# EAGLE board VCAMatrix (EAGLE 7.5.0), part 1 of 2
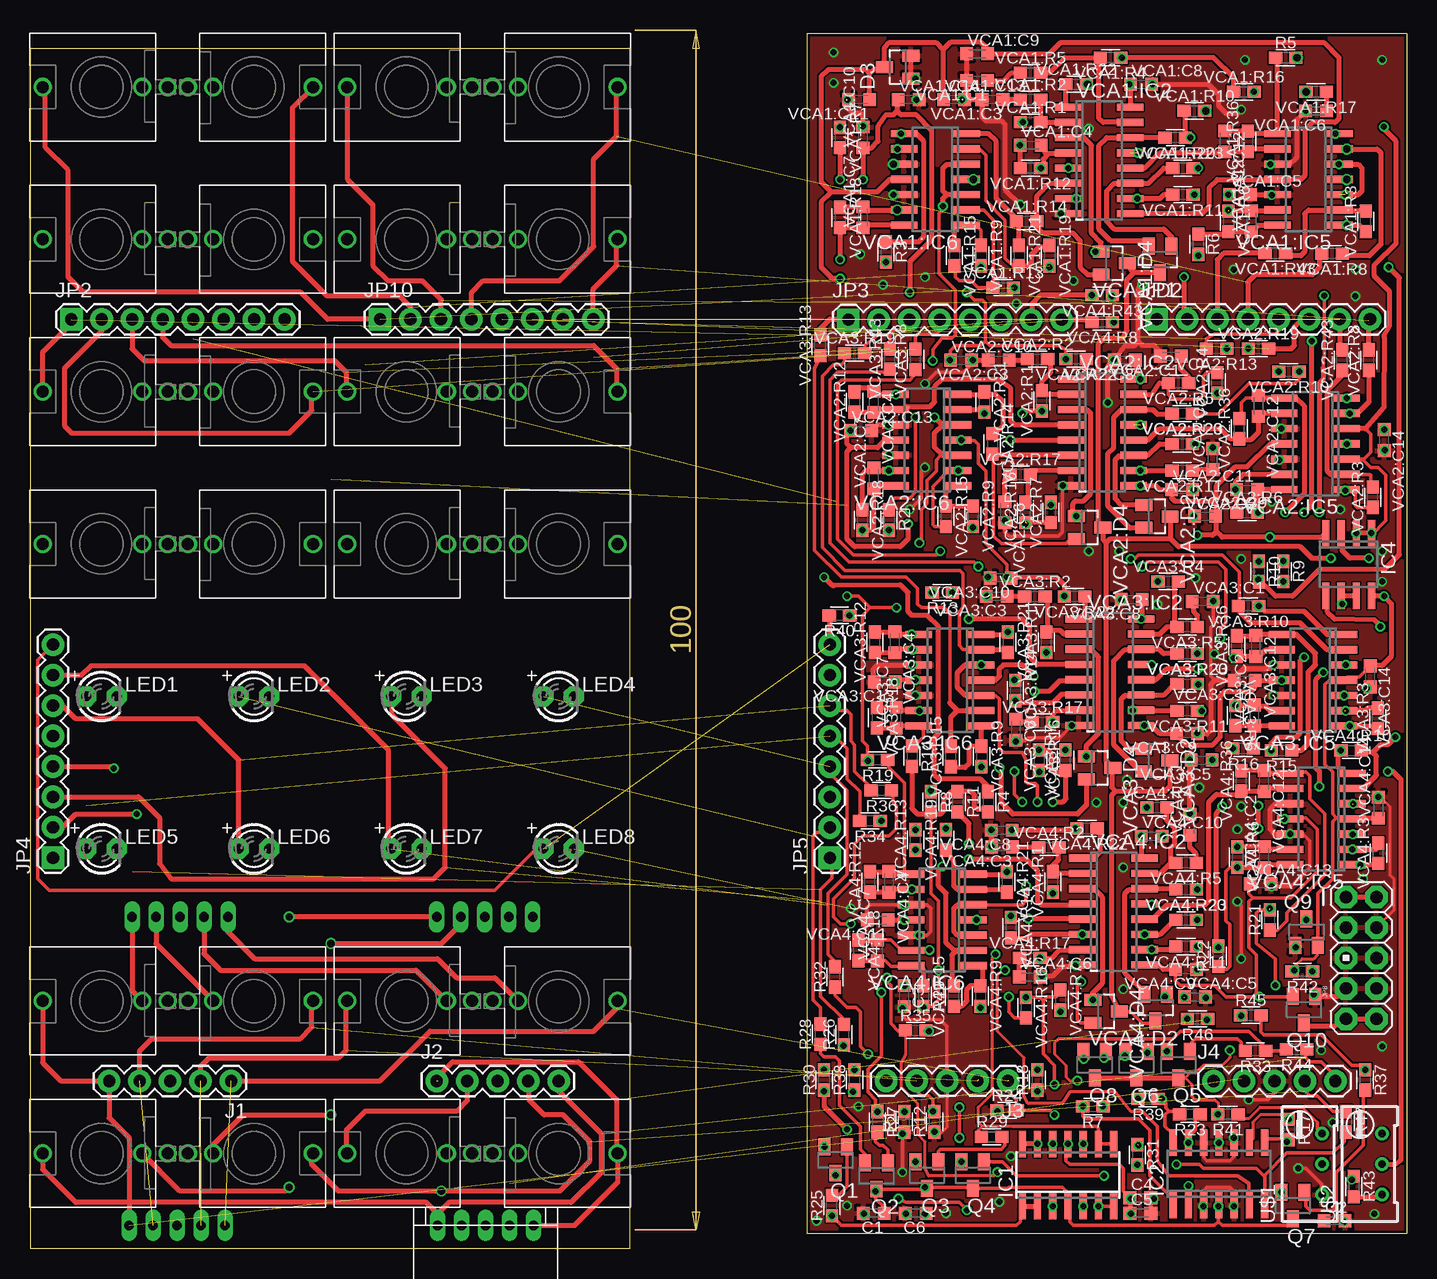
[diagram p0: board, top side]
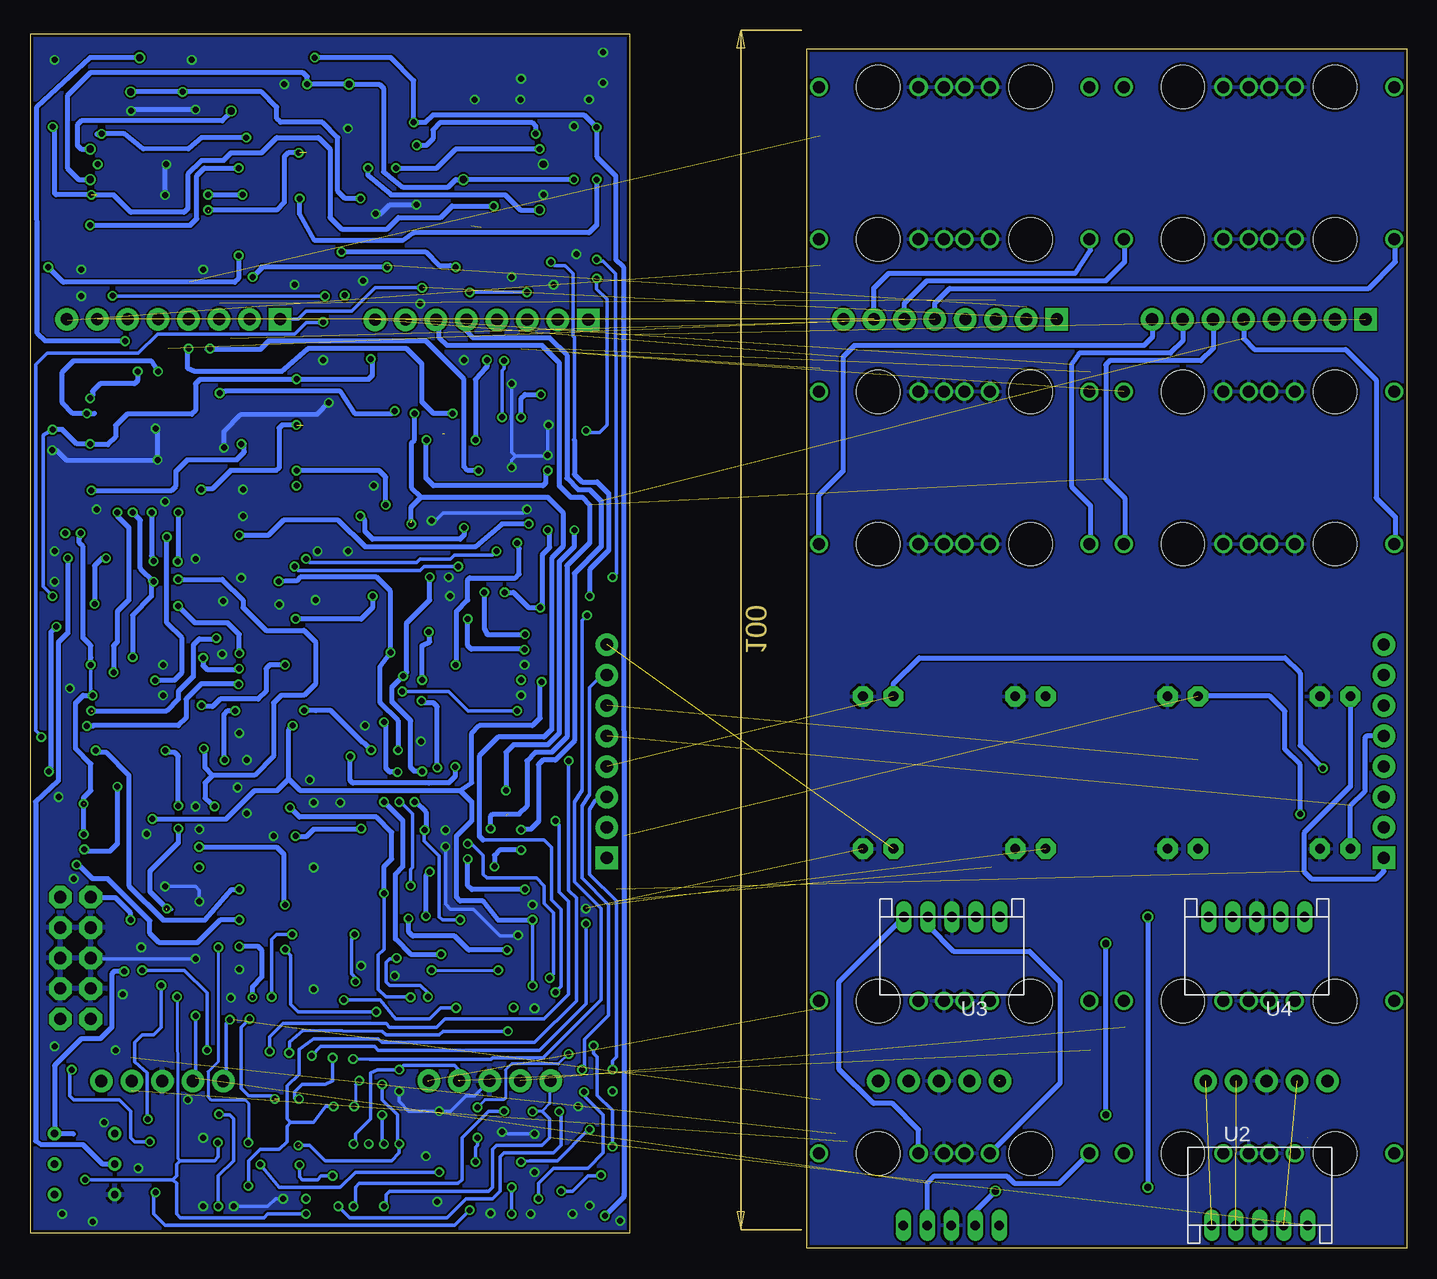
[diagram p1: board, bottom side, seen from below]

Size 114.77 x 101.24 mm. Coordinates in mm from the lower left corner, seen from the top.
Outline: 0,0 50,0 50,100 0,100 0,0
Outline: 114.77,101.24 64.77,101.24 64.77,1.24 114.77,1.24 114.77,101.24
Copper layers (1*16): Top 0.035mm / dielectric 1.5mm / Bottom 0.035mm
Design rules "SeeedStudio_2layer_DRU_no_angle_20140221": minimum track width 6mil, minimum drill 12mil, track to track 6mil, track to pad 6mil, pad to pad 6mil, via to via 6mil, smd to smd 0mil, copper to edge 10mil, drill to drill 10mil, minimum pad ring 10mil, minimum via ring 6mil, stop-mask expansion 2mil, vias tented up to drill 100mil, thermal gap 10mil

## Footprints (pad centres in the part's own frame; a part is rotated, then mirrored left to right if it is on the bottom)
C0603K = smd 1.05 x 1.08: 1 -0.875,0; 2 0.875,0
THONKICONN = drill 1: P$1 0,-5.5; P$2 0,-3.38; P$3 0,4.92 | hole 3.6: 0,0
SOT23 = smd 1 x 1.4: 1 -0.95,-1.1; 2 0.95,-1.1; 3 0,1.1
SO14 = smd 0.6 x 2.2: 1 -3.81,-2.6; 2 -2.54,-2.6; 3 -1.27,-2.6; 4 0,-2.6; 5 1.27,-2.6; 6 2.54,-2.6; 7 3.81,-2.6; 8 3.81,2.6; 9 2.54,2.6; 10 1.27,2.6; 11 0,2.6; 12 -1.27,2.6; 13 -2.54,2.6; 14 -3.81,2.6
SO08 = smd 0.6 x 2.2: 1 -1.905,-2.6; 2 -0.635,-2.6; 3 0.635,-2.6; 4 1.905,-2.6; 5 1.905,2.6; 6 0.635,2.6; 7 -0.635,2.6; 8 -1.905,2.6
1X05 = drill 1.016 pad 1.88: 1 0,0; 2 2.54,0; 3 5.08,0; 4 7.62,0; 5 10.16,0
1X08 = drill 1.016 pad 1.88 square: 1 0,0 | drill 1.016 pad 1.88: 2 2.54,0; 3 5.08,0; 4 7.62,0; 5 10.16,0; 6 12.7,0; 7 15.24,0; 8 17.78,0
AVR_ICSP = drill 1.016 pad 1.88 octagon: 1 -1.27,5.08; 2 1.27,5.08; 3 -1.27,2.54; 4 1.27,2.54; 5 -1.27,0; 6 1.27,0; 7 -1.27,-2.54; 8 1.27,-2.54; 9 -1.27,-5.08; 10 1.27,-5.08
LED3MM = drill 0.813 pad 1.676 octagon: A -1.27,0; K 1.27,0
0603 = smd 1.1 x 1: 1 -0.85,0; 2 0.85,0
CON-JST_PH_5W = drill 0.8 long: P1 0,0; P2 -2,0; P3 -4,0; P4 -6,0; P5 -8,0
RTRIM64W = drill 0.61: 1 1.27,-2.54; 2 1.27,0; 3 1.27,2.54
SOIC16N = smd 0.6 x 2.2: 1 -4.445,-2.6; 2 -3.175,-2.6; 3 -1.905,-2.6; 4 -0.635,-2.6; 5 0.635,-2.6; 6 1.905,-2.6; 7 3.175,-2.6; 8 4.445,-2.6; 9 4.445,2.6; 10 3.175,2.6; 11 1.905,2.6; 12 0.635,2.6; 13 -0.635,2.6; 14 -1.905,2.6; 15 -3.175,2.6; 16 -4.445,2.6

## Placement (x,y rotation side)
C1  100n  [C0603K]  70.34,2.91 180 top
C2  100n  [C0603K]  108.75,2.27 0 top
C3  100n  [C0603K]  72.88,21 270 top
C4  100n  [C0603K]  92.56,4.18 0 top
C5  100n  [C0603K]  92.56,2.91 0 top
C6  100n  [C0603K]  73.83,2.91 180 top
CV_AA  THONKICONN  [THONKICONN]  5.97,96.8 90 top
CV_AB  THONKICONN  [THONKICONN]  18.67,96.8 270 top
CV_AC  THONKICONN  [THONKICONN]  31.37,96.8 90 top
CV_AD  THONKICONN  [THONKICONN]  44.07,96.8 270 top
CV_BA  THONKICONN  [THONKICONN]  5.97,84.1 90 top
CV_BB  THONKICONN  [THONKICONN]  18.67,84.1 270 top
CV_BC  THONKICONN  [THONKICONN]  31.37,84.1 90 top
CV_BD  THONKICONN  [THONKICONN]  44.07,84.1 270 top
CV_CA  THONKICONN  [THONKICONN]  5.97,71.4 90 top
CV_CB  THONKICONN  [THONKICONN]  18.67,71.4 270 top
CV_CC  THONKICONN  [THONKICONN]  31.37,71.4 90 top
CV_CD  THONKICONN  [THONKICONN]  44.07,71.4 270 top
CV_DA  THONKICONN  [THONKICONN]  5.97,58.7 90 top
CV_DB  THONKICONN  [THONKICONN]  18.67,58.7 270 top
CV_DC  THONKICONN  [THONKICONN]  31.37,58.7 90 top
CV_DD  THONKICONN  [THONKICONN]  44.07,58.7 270 top
D3  BAT54A  [SOT23]  72.33,98.45 90 top
IC1  QUAD_OPAMPD  [SO14]  86.53,6.08 0 top
IC2  TL074D  [SO14]  99.11,6.19 0 top
IC4  TL072D  [SO08]  109.92,56.99 180 top
IN_A  THONKICONN  [THONKICONN]  5.97,20.6 90 top
IN_B  THONKICONN  [THONKICONN]  18.67,20.6 270 top
IN_C  THONKICONN  [THONKICONN]  31.37,20.6 90 top
IN_D  THONKICONN  [THONKICONN]  44.07,20.6 270 top
J1  [1X05]  16.76,13.93 180 top
J2  [1X05]  33.91,13.93 0 top
J3  [1X05]  81.53,13.94 180 top
J4  [1X05]  98.66,13.92 0 top
JP1  [1X08]  93.93,77.43 0 top
JP2  [1X08]  3.44,77.42 0 top
JP3  [1X08]  68.22,77.4 0 top
JP4  [1X08]  1.91,32.53 90 top
JP5  [1X08]  66.68,32.52 90 top
JP8  M05X2PTH  [AVR_ICSP]  110.98,24.18 0 top
JP10  [1X08]  29.18,77.43 0 top
LED1  [LED3MM]  5.97,46 0 top
LED2  [LED3MM]  18.67,46 0 top
LED3  [LED3MM]  31.37,46 0 top
LED4  [LED3MM]  44.07,46 0 top
LED5  [LED3MM]  5.97,33.3 0 top
LED6  [LED3MM]  18.67,33.3 0 top
LED7  [LED3MM]  31.37,33.3 0 top
LED8  [LED3MM]  44.07,33.3 0 top
OUTA  THONKICONN  [THONKICONN]  5.97,7.9 90 top
OUTB  THONKICONN  [THONKICONN]  18.67,7.9 270 top
OUTC  THONKICONN  [THONKICONN]  31.37,7.9 90 top
OUTD  THONKICONN  [THONKICONN]  44.07,7.9 270 top
Q1  BC846ALT1SMD  [SOT23]  67.16,7.35 180 top
Q2  BC846ALT1SMD  [SOT23]  70.56,6.02 180 top
Q3  BC846ALT1SMD  [SOT23]  74.78,6.08 180 top
Q4  BC846ALT1SMD  [SOT23]  78.59,6.08 180 top
Q5  BC846ALT1SMD  [SOT23]  95.74,15.29 180 top
Q6  BC846ALT1SMD  [SOT23]  92.24,15.29 180 top
Q7  BC846ALT1SMD  [SOT23]  105.26,3.54 180 top
Q8  BC846ALT1SMD  [SOT23]  88.75,15.29 180 top
Q9  BSS84  [SOT23]  106.41,26.34 0 top
Q10  BSS123  [SOT23]  106.2,19.88 180 top
R1  100k  [0603]  72.88,10.53 90 top
R2  100k  [0603]  71.61,60.69 270 top
R3  100k  [0603]  71.34,83.05 270 top
R4  100k  [0603]  79.86,37.2 270 top
R5  100k  [0603]  104.68,99.24 0 top
R6  100k  [0603]  97.38,83.68 270 top
R7  100k  [0603]  88.6,11.8 180 top
R8  100k  [0603]  75.1,37.2 270 top
R9  100k  [0603]  104.47,56.41 270 top
R10  100k  [0603]  102.45,56.4 270 top
R11  100k  [0603]  77.32,37.2 270 top
R12  100k  [0603]  75.42,10.53 90 top
R13  100k  [0603]  76.05,54.66 180 top
R14  100k  [0603]  73.51,41.01 270 top
R15  100k  [0603]  104.33,41.47 180 top
R16  100k  [0603]  101.13,41.64 180 top
R17  100k  [0603]  104.94,9.89 270 top
R18  100k  [0603]  83.99,14.02 90 top
R19  100k  [0603]  70.65,40.69 180 top
R20  100k  [0603]  74.46,21 270 top
R21  100k  [0603]  103.36,27.35 90 top
R22  100k  [0603]  99.06,24.33 90 top
R23  100k  [0603]  96.69,11.16 180 top
R24  100k  [0603]  81.45,11.48 0 top
R25  20k  [0603]  66.84,3.54 90 top
R26  560  [0603]  67.87,17.8 90 top
R27  20k  [0603]  70.65,10.53 270 top
R28  560  [0603]  65.89,17.83 90 top
R29  20k  [0603]  80.17,9.28 0 top
R30  560  [0603]  66.21,14.02 90 top
R31  20k  [0603]  92.31,7.77 270 top
R32  560  [0603]  67.11,22.61 90 top
R33  20k  [0603]  102.15,16.44 180 top
R34  560  [0603]  70.02,35.61 180 top
R35  20k  [0603]  73.83,18.15 0 top
R36  560  [0603]  70.97,38.15 180 top
R37  20k  [0603]  111.29,14.02 270 top
R38  560  [0603]  68.75,14.02 90 top
R39  20k  [0603]  93.2,12.43 180 top
R40  560  [0603]  67.48,52.75 180 top
R41  10k  [0603]  99.86,11.16 180 top
R42  10k  [0603]  106.06,23.07 180 top
R43  10k  [0603]  110.34,5.13 270 top
R44  1k  [0603]  105.58,16.56 180 top
R45  1k  [0603]  101.77,19.42 0 top
R46  1k  [0603]  97.32,19.1 180 top
R47  1k  [0603]  109.71,10.53 270 top
U1  CON-JST_PH_5W  [CON-JST_PH_5W]  33.98,1.89 180 top
U2  CON-JST_PH_5W  [CON-JST_PH_5W]  8.26,1.89 0 bottom
U3  CON-JST_PH_5W  [CON-JST_PH_5W]  41.91,27.61 180 bottom
U4  CON-JST_PH_5W  [CON-JST_PH_5W]  16.52,27.61 180 bottom
U$1  [RTRIM64W]  106.44,7 0 top
U$2  [RTRIM64W]  111.45,7 0 top
VCA1:C1  560p  [C0603K]  78.96,97.34 180 top
VCA1:C2  100p  [C0603K]  101.82,85.59 90 top
VCA1:C3  560p  [C0603K]  80.23,95.75 180 top
VCA1:C4  100p  [C0603K]  83.41,91.94 0 top
VCA1:C5  560p  [C0603K]  100.87,87.81 0 top
VCA1:C6  560p  [C0603K]  107.22,94.8 180 top
VCA1:C7  100p  [C0603K]  69.44,85.91 90 top
VCA1:C8  100n  [C0603K]  92.61,97.02 0 top
VCA1:C9  100n  [C0603K]  78.96,99.56 0 top
VCA1:C10  100n  [C0603K]  69.44,92.57 90 top
VCA1:C11  100n  [C0603K]  69.12,95.75 180 top
VCA1:C12  100p  [C0603K]  99.6,92.26 270 top
VCA1:C13  100n  [C0603K]  77.06,95.75 0 top
VCA1:C14  100n  [C0603K]  73.25,95.75 0 top
VCA1:D2  BAT54A  [SOT23]  94.2,82.41 180 top
VCA1:D4  BAT54A  [SOT23]  90.39,82.1 270 top
VCA1:IC2  SSM2164S  [SOIC16N]  89.12,90.67 270 top
VCA1:IC5  TL074D  [SO14]  106.58,89.08 90 top
VCA1:IC6  TL074D  [SO14]  75.47,89.08 90 top
VCA1:R1  30k  [0603]  83.41,93.84 0 top
VCA1:R2  500  [0603]  83.41,95.75 0 top
VCA1:R3  68k  [0603]  111.35,85.59 90 top
VCA1:R4  30k  [0603]  90.07,99.24 180 top
VCA1:R5  500  [0603]  83.41,97.97 0 top
VCA1:R6  30k  [0603]  99.92,85.59 270 top
VCA1:R7  30k  [0603]  67.53,92.57 270 top
VCA1:R8  100k  [0603]  108.54,82.9 180 top
VCA1:R9  560  [0603]  79.28,82.73 270 top
VCA1:R10  68k  [0603]  97.06,94.8 0 top
VCA1:R11  500  [0603]  96.11,87.81 180 top
VCA1:R12  30k  [0603]  83.41,90.03 180 top
VCA1:R13  100k  [0603]  81.13,80.06 0 top
VCA1:R14  560  [0603]  83.09,85.59 0 top
VCA1:R15  68k  [0603]  77.06,82.73 270 top
VCA1:R16  30k  [0603]  101.19,96.38 0 top
VCA1:R17  500  [0603]  107.22,96.38 180 top
VCA1:R18  30k  [0603]  67.53,85.91 270 top
VCA1:R19  100k  [0603]  84.99,82.73 270 top
VCA1:R20  560  [0603]  95.47,92.57 180 top
VCA1:R21  68k  [0603]  82.45,82.73 270 top
VCA1:R22  6k  [0603]  87.22,97.02 0 top
VCA1:R23  560  [0603]  96.11,90.03 0 top
VCA1:R36  30k  [0603]  101.5,92.26 90 top
VCA1:R43  100k  [0603]  103.81,82.93 180 top
VCA2:C1  560p  [C0603K]  95.1,74.34 180 top
VCA2:C2  100p  [C0603K]  101.45,63.23 180 top
VCA2:C3  560p  [C0603K]  80.76,74.01 180 top
VCA2:C4  100p  [C0603K]  70.34,70.53 270 top
VCA2:C5  560p  [C0603K]  98.59,65.77 90 top
VCA2:C6  560p  [C0603K]  81.28,61.33 270 top
VCA2:C7  100p  [C0603K]  70.34,64.18 90 top
VCA2:C8  100n  [C0603K]  91.27,74.03 180 top
VCA2:C9  100n  [C0603K]  97.96,61.01 0 top
VCA2:C10  100n  [C0603K]  77.62,74.01 0 top
VCA2:C11  100n  [C0603K]  96.05,63.23 0 top
VCA2:C12  100p  [C0603K]  102.4,70.22 270 top
VCA2:C13  100n  [C0603K]  69.28,68.13 0 top
VCA2:C14  100n  [C0603K]  112.88,67.36 270 top
VCA2:D2  BAT54A  [SOT23]  93.95,61 270 top
VCA2:D4  BAT54A  [SOT23]  88.34,60.08 270 top
VCA2:IC2  SSM2164S  [SOIC16N]  89.39,67.99 270 top
VCA2:IC5  TL074D  [SO14]  107.17,67.04 90 top
VCA2:IC6  TL074D  [SO14]  74.78,67.36 90 top
VCA2:R1  30k  [0603]  84.36,70.64 90 top
VCA2:R2  500  [0603]  83.99,74.11 0 top
VCA2:R3  68k  [0603]  111.93,62.6 90 top
VCA2:R4  30k  [0603]  98.96,72.12 90 top
VCA2:R5  500  [0603]  95.74,72.12 180 top
VCA2:R6  30k  [0603]  101.45,61.33 0 top
VCA2:R7  30k  [0603]  85.11,61.33 90 top
VCA2:R8  100k  [0603]  111.61,74.03 90 top
VCA2:R9  560  [0603]  78.59,61.01 270 top
VCA2:R10  68k  [0603]  104.94,73.07 180 top
VCA2:R11  500  [0603]  96.05,64.82 180 top
VCA2:R12  30k  [0603]  68.75,70.53 90 top
VCA2:R13  100k  [0603]  98.91,74.98 180 top
VCA2:R14  560  [0603]  80.21,67.04 270 top
VCA2:R15  68k  [0603]  76.37,61.01 270 top
VCA2:R16  30k  [0603]  82.99,61.33 90 top
VCA2:R17  500  [0603]  82.55,64.5 0 top
VCA2:R18  30k  [0603]  69.38,60.69 270 top
VCA2:R19  100k  [0603]  102.4,74.98 0 top
VCA2:R20  560  [0603]  96.05,69.58 180 top
VCA2:R21  68k  [0603]  79.54,70.53 270 top
VCA2:R22  6k  [0603]  87.21,74.12 180 top
VCA2:R23  560  [0603]  96.05,67.04 0 top
VCA2:R36  30k  [0603]  100.82,68.31 90 top
VCA2:R43  100k  [0603]  109.39,74.03 90 top
VCA3:C1  560p  [C0603K]  97.76,53.91 0 top
VCA3:C2  100p  [C0603K]  102.06,44.4 90 top
VCA3:C3  560p  [C0603K]  80.6,54.34 180 top
VCA3:C4  100p  [C0603K]  72.09,50.51 270 top
VCA3:C5  560p  [C0603K]  97.68,40.67 180 top
VCA3:C6  560p  [C0603K]  82.19,43.2 270 top
VCA3:C7  100p  [C0603K]  72.21,44.21 90 top
VCA3:C8  100n  [C0603K]  91.82,54.05 180 top
VCA3:C9  100n  [C0603K]  96.47,42.9 180 top
VCA3:C10  100n  [C0603K]  80.9,55.86 180 top
VCA3:C11  100n  [C0603K]  101.24,47.33 180 top
VCA3:C12  100p  [C0603K]  102.19,50.19 270 top
VCA3:C13  100n  [C0603K]  71.25,47.21 180 top
VCA3:C14  100n  [C0603K]  111.71,47.65 270 top
VCA3:D2  BAT54A  [SOT23]  93.93,40.66 270 top
VCA3:D4  BAT54A  [SOT23]  89.17,40.03 270 top
VCA3:IC2  SSM2164S  [SOIC16N]  90.03,48.01 270 top
VCA3:IC5  TL074D  [SO14]  106.95,47.33 90 top
VCA3:IC6  TL074D  [SO14]  76.69,47.35 90 top
VCA3:R1  30k  [0603]  84.73,50.51 90 top
VCA3:R2  500  [0603]  83.77,54.32 0 top
VCA3:R3  68k  [0603]  112.35,44.16 90 top
VCA3:R4  30k  [0603]  94.89,55.59 0 top
VCA3:R5  500  [0603]  96.47,51.78 180 top
VCA3:R6  30k  [0603]  100.47,44.4 270.4 top
VCA3:R7  30k  [0603]  86.33,40.66 90 top
VCA3:R8  100k  [0603]  73.83,74.1 90 top
VCA3:R9  560  [0603]  79.33,40.98 270 top
VCA3:R10  68k  [0603]  101.57,53.53 180 top
VCA3:R11  500  [0603]  96.47,44.79 180 top
VCA3:R12  30k  [0603]  70.45,50.51 90 top
VCA3:R13  100k  [0603]  65.88,75.26 90 top
VCA3:R14  560  [0603]  82.14,46.48 270 top
VCA3:R15  68k  [0603]  76.79,40.98 90 top
VCA3:R16  30k  [0603]  84.09,40.66 270 top
VCA3:R17  500  [0603]  84.41,43.84 0 top
VCA3:R18  30k  [0603]  70.59,44.21 270 top
VCA3:R19  100k  [0603]  68.74,74.62 0 top
VCA3:R20  560  [0603]  96.47,49.55 180 top
VCA3:R21  68k  [0603]  81.53,50.51 270 top
VCA3:R22  6k  [0603]  87.08,54.32 180 top
VCA3:R23  560  [0603]  96.47,47.01 0 top
VCA3:R36  30k  [0603]  100.6,50.19 90 top
VCA3:R43  100k  [0603]  71.7,74.12 90 top
VCA4:C1  560p  [C0603K]  96.69,35.29 90 top
VCA4:C2  100p  [C0603K]  102.89,32.59 90 top
VCA4:C3  560p  [C0603K]  81.05,33.44 180 top
VCA4:C4  100p  [C0603K]  71.61,30.53 270 top
VCA4:C5  560p  [C0603K]  97.13,20.93 0 top
VCA4:C6  560p  [C0603K]  83.35,22.59 0 top
VCA4:C7  100p  [C0603K]  70.65,24.81 90 top
VCA4:C8  100n  [C0603K]  81,34.84 180 top
VCA4:C9  100n  [C0603K]  96.37,23.23 180 top
VCA4:C10  100n  [C0603K]  93.51,34.34 0 top
VCA4:C11  100n  [C0603K]  70.65,27.35 180 top
VCA4:C12  100p  [C0603K]  102.89,38.94 270 top
VCA4:C13  100n  [C0603K]  102.57,30.37 0 top
VCA4:C14  100n  [C0603K]  112.41,36.72 90 top
VCA4:D2  BAT54A  [SOT23]  93.83,20.05 180 top
VCA4:D4  BAT54A  [SOT23]  89.7,19.73 270 top
VCA4:IC2  SSM2164S  [SOIC16N]  90.32,28.06 270 top
VCA4:IC5  TL074D  [SO14]  107.65,35.77 90 top
VCA4:IC6  TL074D  [SO14]  76.05,27.35 90 top
VCA4:R1  30k  [0603]  85.26,30.53 90 top
VCA4:R2  500  [0603]  84.94,33.39 0 top
VCA4:R3  68k  [0603]  112.41,32.91 90 top
VCA4:R4  30k  [0603]  93.95,36.72 0 top
VCA4:R5  500  [0603]  96.37,32.12 180 top
VCA4:R6  30k  [0603]  100.66,32.59 270 top
VCA4:R7  30k  [0603]  85.89,20.69 270 top
VCA4:R8  100k  [0603]  89.39,77.2 180 top
VCA4:R9  560  [0603]  79.23,21 270 top
VCA4:R10  68k  [0603]  110.14,41.48 0 top
VCA4:R11  500  [0603]  96.37,25.13 180 top
VCA4:R12  30k  [0603]  70.02,30.53 90 top
VCA4:R13  100k  [0603]  73.83,34.02 90 top
VCA4:R14  560  [0603]  81.77,26.72 270 top
VCA4:R15  68k  [0603]  77,21 90 top
VCA4:R16  30k  [0603]  83.04,20.05 270 top
VCA4:R17  500  [0603]  83.35,24.18 0 top
VCA4:R18  30k  [0603]  69.07,24.81 270 top
VCA4:R19  100k  [0603]  76.37,34.02 90 top
VCA4:R20  560  [0603]  96.37,29.89 180 top
VCA4:R21  68k  [0603]  81.45,30.53 270 top
VCA4:R22  6k  [0603]  88.12,34.97 180 top
VCA4:R23  560  [0603]  96.37,27.35 0 top
VCA4:R36  30k  [0603]  100.98,38.94 90 top
VCA4:R43  100k  [0603]  89.39,79.42 180 top

## Library data of the parts
C1-C6 CV_AA CV_AB CV_AC CV_AD CV_BA CV_BB CV_BC CV_BD CV_CA CV_CB CV_CC CV_CD CV_DA CV_DB CV_DC CV_DD IN_A IN_B IN_C IN_D OUTA OUTB OUTC OUTD R1-R47 U1-U4 VCA1:C8-VCA1:C11 VCA1:C13 VCA1:C14 VCA1:R1-VCA1:R23 VCA1:R36 VCA1:R43 VCA2:C8-VCA2:C11 VCA2:C13 VCA2:C14 VCA2:R1-VCA2:R23 VCA2:R36 VCA2:R43 VCA3:C8-VCA3:C11 VCA3:C13 VCA3:C14 VCA3:R1-VCA3:R23 VCA3:R36 VCA3:R43 VCA4:C8-VCA4:C11 VCA4:C13 VCA4:C14 VCA4:R1-VCA4:R23 VCA4:R36 VCA4:R43 = Rebel
D3 VCA1:D2 VCA1:D4 VCA2:D2 VCA2:D4 VCA3:D2 VCA3:D4 VCA4:D2 VCA4:D4 = diode
IC1 LED1-LED8 = adafruit
IC2 IC4 VCA1:IC5 VCA1:IC6 VCA2:IC5 VCA2:IC6 VCA3:IC5 VCA3:IC6 VCA4:IC5 VCA4:IC6 = linear
J1-J4 = SparkFun-Connectors
JP1-JP5 JP8 JP10 = SparkFun
Q1-Q8 = transistor-npn
Q9 = transistor-small-signal; OC_FARNELL: 1779264
Q10 = transistor-small-signal; OC_FARNELL: 1843725
U$1 U$2 VCA1:C1-VCA1:C7 VCA1:C12 VCA2:C1-VCA2:C7 VCA2:C12 VCA3:C1-VCA3:C7 VCA3:C12 VCA4:C1-VCA4:C7 VCA4:C12 = resistor
VCA1:IC2 VCA2:IC2 VCA3:IC2 VCA4:IC2 = ssm2164

## Nets
+12V: C1.1 C2.1 C6.1 IC1.4 IC2.4 IC4.8 Q1.3 Q2.3 Q3.3 Q4.3 Q5.3 Q6.3 Q7.3 Q8.3 Q9.2 R41.2 R42.2 VCA1:C8.1 VCA1:C10.1 VCA1:C14.1 VCA1:IC2.16 VCA1:IC5.4 VCA1:IC6.4 VCA1:R22.2 VCA2:C8.1 VCA2:C10.1 VCA2:C14.1 VCA2:IC2.16 VCA2:IC5.4 VCA2:IC6.4 VCA2:R22.2 VCA3:C8.1 VCA3:C10.1 VCA3:C14.1 VCA3:IC2.16 VCA3:IC5.4 VCA3:IC6.4 VCA3:R22.2 VCA4:C8.1 VCA4:C10.1 VCA4:C14.1 VCA4:IC2.16 VCA4:IC5.4 VCA4:IC6.4 VCA4:R22.2
-12V: C3.1 C4.1 C5.1 D3.3 IC1.11 IC2.11 IC4.4 Q10.2 R43.1 VCA1:C9.2 VCA1:C11.1 VCA1:C13.1 VCA1:IC2.9 VCA1:IC5.11 VCA1:IC6.11 VCA2:C9.2 VCA2:C11.1 VCA2:C13.1 VCA2:IC2.9 VCA2:IC5.11 VCA2:IC6.11 VCA3:C9.2 VCA3:C11.1 VCA3:C13.1 VCA3:IC2.9 VCA3:IC5.11 VCA3:IC6.11 VCA4:C9.2 VCA4:C11.1 VCA4:C13.1 VCA4:IC2.9 VCA4:IC5.11 VCA4:IC6.11
CLAMP_REF: IC4.6 IC4.7 VCA1:D2.3 VCA1:D4.3 VCA2:D2.3 VCA2:D4.3 VCA3:D2.3 VCA3:D4.3 VCA4:D2.3 VCA4:D4.3
CV_AA: CV_AA.P$3 JP1.1 JP10.1 VCA1:R13.2
CV_AB: CV_AB.P$3 JP1.2 JP10.2 VCA1:R19.2
CV_AC: CV_AC.P$3 JP1.3 JP10.3 VCA1:R43.2
CV_AD: CV_AD.P$3 JP1.4 JP10.4 VCA1:R8.2
CV_BA: CV_BA.P$3 JP1.5 JP10.5 VCA2:R13.2
CV_BB: CV_BB.P$3 JP1.6 JP10.6 VCA2:R19.2
CV_BC: CV_BC.P$3 JP1.7 JP10.7 VCA2:R43.2
CV_BD: CV_BD.P$3 JP1.8 JP10.8 VCA2:R8.2
CV_CA: CV_CA.P$3 JP2.1 JP3.1 VCA3:R13.2
CV_CB: CV_CB.P$3 JP2.2 JP3.2 VCA3:R19.2
CV_CC: CV_CC.P$3 JP2.3 JP3.3 VCA3:R43.2
CV_CD: CV_CD.P$3 JP2.4 JP3.4 VCA3:R8.2
CV_DA: CV_DA.P$3 JP2.5 JP3.5 VCA4:R13.2
CV_DB: CV_DB.P$3 JP2.6 JP3.6 VCA4:R19.2
CV_DC: CV_DC.P$3 JP2.7 JP3.7 VCA4:R43.2
CV_DD: CV_DD.P$3 JP2.8 JP3.8 VCA4:R8.2
GND: C1.2 C2.2 C3.2 C4.2 C5.2 C6.2 CV_AA.P$1 CV_AA.P$2 CV_AB.P$1 CV_AB.P$2 CV_AC.P$1 CV_AC.P$2 CV_AD.P$1 CV_AD.P$2 CV_BA.P$1 CV_BA.P$2 CV_BB.P$1 CV_BB.P$2 CV_BC.P$1 CV_BC.P$2 CV_BD.P$1 CV_BD.P$2 CV_CA.P$1 CV_CA.P$2 CV_CB.P$1 CV_CB.P$2 CV_CC.P$1 CV_CC.P$2 CV_CD.P$1 CV_CD.P$2 CV_DA.P$1 CV_DA.P$2 CV_DB.P$1 CV_DB.P$2 CV_DC.P$1 CV_DC.P$2 CV_DD.P$1 CV_DD.P$2 D3.1 D3.2 IC2.3 IC2.5 IC2.10 IC2.12 IN_A.P$1 IN_B.P$1 IN_C.P$1 IN_D.P$1 J1.3 J2.3 J3.3 J4.3 JP8.3 JP8.4 JP8.5 JP8.6 JP8.7 JP8.8 LED1.K LED2.K LED3.K LED4.K LED5.K LED6.K LED7.K LED8.K OUTA.P$1 OUTB.P$1 OUTC.P$1 OUTD.P$1 Q9.1 Q10.1 R1.1 R12.1 R18.1 R24.1 U1.P3 U2.P3 U3.P3 U4.P3 U$1.1 VCA1:C1.2 VCA1:C3.2 VCA1:C5.2 VCA1:C6.2 VCA1:C8.2 VCA1:C9.1 VCA1:C10.2 VCA1:C11.2 VCA1:C13.2 VCA1:C14.2 VCA1:IC2.8 VCA1:IC5.10 VCA1:IC5.12 VCA1:IC6.10 VCA1:IC6.12 VCA2:C1.2 VCA2:C3.2 VCA2:C5.2 VCA2:C6.2 VCA2:C8.2 VCA2:C9.1 VCA2:C10.2 VCA2:C11.2 VCA2:C13.2 VCA2:C14.2 VCA2:IC2.8 VCA2:IC5.10 VCA2:IC5.12 VCA2:IC6.10 VCA2:IC6.12 VCA3:C1.2 VCA3:C3.2 VCA3:C5.2 VCA3:C6.2 VCA3:C8.2 VCA3:C9.1 VCA3:C10.2 VCA3:C11.2 VCA3:C13.2 VCA3:C14.2 VCA3:IC2.8 VCA3:IC5.10 VCA3:IC5.12 VCA3:IC6.10 VCA3:IC6.12 VCA4:C1.2 VCA4:C3.2 VCA4:C5.2 VCA4:C6.2 VCA4:C8.2 VCA4:C9.1 VCA4:C10.2 VCA4:C11.2 VCA4:C13.2 VCA4:C14.2 VCA4:IC2.8 VCA4:IC5.10 VCA4:IC5.12 VCA4:IC6.10 VCA4:IC6.12
IN_A: IC1.3 IN_A.P$3 J1.5 J3.5 R1.2 U2.P1
IN_B: IC1.5 IN_B.P$3 J1.4 J3.4 R12.2 U2.P2
IN_C: IC1.10 IN_C.P$3 J1.2 J3.2 R18.2 U2.P4
IN_D: IC1.12 IN_D.P$3 J1.1 J3.1 R24.2 U2.P5
LED_1: JP4.1 JP5.1 LED1.A R26.2
LED_2: JP4.2 JP5.2 LED2.A R28.2
LED_3: JP4.3 JP5.3 LED3.A R30.2
LED_4: JP4.4 JP5.4 LED4.A R32.2
LED_5: JP4.5 JP5.5 LED5.A R34.2
LED_6: JP4.6 JP5.6 LED6.A R36.2
LED_7: JP4.7 JP5.7 LED7.A R38.2
LED_8: JP4.8 JP5.8 LED8.A R40.2
N$3: IC1.6 IC1.7 R27.1 VCA2:R1.1 VCA2:R4.1 VCA2:R7.1 VCA2:R16.1
N$4: Q1.2 R26.1
N$5: JP8.9 JP8.10 Q10.3
N$7: R3.1 VCA1:C4.1 VCA1:IC6.8 VCA1:R12.2
N$8: R4.1 VCA1:C7.1 VCA1:IC6.14 VCA1:R18.2
N$9: R5.1 VCA1:C12.1 VCA1:IC5.8 VCA1:R36.2
N$10: R6.1 VCA1:C2.1 VCA1:IC5.14 VCA1:R6.2
N$11: IC2.9 R5.2 R9.2 R15.2 R17.1 R21.2
N$13: R41.1 U$1.3
N$17: R2.1 VCA2:C4.1 VCA2:IC6.8 VCA2:R12.2
N$18: R8.1 VCA2:C7.1 VCA2:IC6.14 VCA2:R18.2
N$19: R9.1 VCA2:C12.1 VCA2:IC5.8 VCA2:R36.2
N$20: R10.1 VCA2:C2.1 VCA2:IC5.14 VCA2:R6.2
N$21: Q1.1 R25.2
N$22: IC1.13 IC1.14 R31.1 VCA4:R1.1 VCA4:R4.1 VCA4:R7.1 VCA4:R16.1
N$23: IC1.8 IC1.9 R29.1 VCA3:R1.1 VCA3:R4.1 VCA3:R7.1 VCA3:R16.1
N$24: Q8.2 R40.1
N$28: R13.1 VCA3:C4.1 VCA3:IC6.8 VCA3:R12.2
N$29: R14.1 VCA3:C7.1 VCA3:IC6.14 VCA3:R18.2
N$30: R15.1 VCA3:C12.1 VCA3:IC5.8 VCA3:R36.2
N$31: R16.1 VCA3:C2.1 VCA3:IC5.14 VCA3:R6.2
N$33: IC4.3 U$1.2
N$34: IC4.1 IC4.2 VCA1:IC5.3 VCA1:IC5.5 VCA1:IC6.3 VCA1:IC6.5 VCA2:IC5.3 VCA2:IC5.5 VCA2:IC6.3 VCA2:IC6.5 VCA3:IC5.3 VCA3:IC5.5 VCA3:IC6.3 VCA3:IC6.5 VCA4:IC5.3 VCA4:IC5.5 VCA4:IC6.3 VCA4:IC6.5
N$39: R19.1 VCA4:C4.1 VCA4:IC6.8 VCA4:R12.2
N$40: R20.1 VCA4:C7.1 VCA4:IC6.14 VCA4:R18.2
N$41: R21.1 VCA4:C12.1 VCA4:IC5.8 VCA4:R36.2
N$42: R22.1 VCA4:C2.1 VCA4:IC5.14 VCA4:R6.2
N$44: R42.1 U$2.3
N$45: Q6.1 R35.2
N$46: Q2.1 R27.2
N$47: IC2.13 R6.2 R10.2 R16.2 R22.2 R23.1
N$49: Q2.2 R28.1
N$51: Q3.1 R29.2
N$53: Q3.2 R30.1
N$54: Q6.2 R36.1
N$55: OUTA.P$2 U3.P5
N$56: Q4.1 R31.2
N$58: IC2.2 R2.2 R3.2 R7.1 R13.2 R19.2
N$59: IC2.6 R4.2 R8.2 R11.1 R14.2 R20.2
N$60: Q4.2 R32.1
N$61: Q7.1 R37.2
N$62: Q5.1 R33.2
N$64: Q5.2 R34.1
N$66: Q7.2 R38.1
N$67: Q8.1 R39.2
N$70: IN_B.P$2 U4.P4
N$71: IN_C.P$2 U4.P2
N$72: IN_D.P$2 U4.P1
N$73: OUTB.P$2 U3.P4
N$74: OUTC.P$2 U3.P2
N$75: OUTD.P$2 U3.P1
N$76: IN_A.P$2 U4.P5
N$77: R43.2 U$2.1
N$78: IC4.5 U$2.2
N$79: JP8.1 JP8.2 Q9.3
N$82: IC1.1 IC1.2 R25.1 VCA1:R1.1 VCA1:R4.1 VCA1:R7.1 VCA1:R16.1
OUT_A: J2.5 J4.5 OUTA.P$3 R44.1 U1.P1
OUT_B: J2.4 J4.4 OUTB.P$3 R47.1 U1.P2
OUT_C: J2.2 J4.2 OUTC.P$3 R45.1 U1.P4
OUT_D: J2.1 J4.1 OUTD.P$3 R46.1 U1.P5
OUTPUT_A: IC2.1 R7.2 R33.1 R44.2
OUTPUT_B: IC2.7 R11.2 R35.1 R47.2
OUTPUT_C: IC2.8 R17.2 R37.1 R45.2
OUTPUT_D: IC2.14 R23.2 R39.1 R46.2
VCA1:IC2_1: VCA1:IC5.7 VCA1:R10.1 VCA1:R20.1
VCA1:IC2_2: VCA1:IC5.6 VCA1:R8.1 VCA1:R10.2
VCA1:IC2_3: VCA1:IC6.1 VCA1:R9.1 VCA1:R15.1
VCA1:IC2_4: VCA1:IC5.2 VCA1:R3.2 VCA1:R43.1
VCA1:IC2_5: VCA1:IC6.2 VCA1:R13.1 VCA1:R15.2
VCA1:IC2_6: VCA1:IC6.7 VCA1:R14.1 VCA1:R21.1
VCA1:IC2_7: VCA1:IC6.6 VCA1:R19.1 VCA1:R21.2
VCA1:IC2_11: VCA1:IC5.1 VCA1:R3.1 VCA1:R23.2
VCA1:N$1: VCA1:D4.1 VCA1:IC2.3 VCA1:R9.2
VCA1:N$2: VCA1:C1.1 VCA1:R5.1
VCA1:N$3: VCA1:C3.1 VCA1:R2.1
VCA1:N$4: VCA1:IC2.15 VCA1:R4.2 VCA1:R5.2
VCA1:N$5: VCA1:IC2.2 VCA1:R1.2 VCA1:R2.2
VCA1:N$6: VCA1:C2.2 VCA1:IC2.13 VCA1:IC5.13 VCA1:R6.1
VCA1:N$7: VCA1:D4.2 VCA1:IC2.6 VCA1:R14.2
VCA1:N$8: VCA1:D2.1 VCA1:IC2.11 VCA1:R23.1
VCA1:N$9: VCA1:C4.2 VCA1:IC2.4 VCA1:IC6.9 VCA1:R12.1
VCA1:N$11: VCA1:C6.1 VCA1:R17.1
VCA1:N$12: VCA1:IC2.7 VCA1:R16.2 VCA1:R17.2
VCA1:N$13: VCA1:C7.2 VCA1:IC2.5 VCA1:IC6.13 VCA1:R18.1
VCA1:N$14: VCA1:D2.2 VCA1:IC2.14 VCA1:R20.2
VCA1:N$17: VCA1:IC2.1 VCA1:R22.1
VCA1:N$19: VCA1:C5.1 VCA1:R11.1
VCA1:N$23: VCA1:IC2.10 VCA1:R7.2 VCA1:R11.2
VCA1:N$49: VCA1:C12.2 VCA1:IC2.12 VCA1:IC5.9 VCA1:R36.1
VCA2:IC2_1: VCA2:IC5.7 VCA2:R10.1 VCA2:R20.1
VCA2:IC2_2: VCA2:IC5.6 VCA2:R8.1 VCA2:R10.2
VCA2:IC2_3: VCA2:IC6.1 VCA2:R9.1 VCA2:R15.1
VCA2:IC2_4: VCA2:IC5.2 VCA2:R3.2 VCA2:R43.1
VCA2:IC2_5: VCA2:IC6.2 VCA2:R13.1 VCA2:R15.2
VCA2:IC2_6: VCA2:IC6.7 VCA2:R14.1 VCA2:R21.1
VCA2:IC2_7: VCA2:IC6.6 VCA2:R19.1 VCA2:R21.2
VCA2:IC2_11: VCA2:IC5.1 VCA2:R3.1 VCA2:R23.2
VCA2:N$1: VCA2:D4.1 VCA2:IC2.3 VCA2:R9.2
VCA2:N$2: VCA2:C1.1 VCA2:R5.1
VCA2:N$3: VCA2:C3.1 VCA2:R2.1
VCA2:N$4: VCA2:IC2.15 VCA2:R4.2 VCA2:R5.2
VCA2:N$5: VCA2:IC2.2 VCA2:R1.2 VCA2:R2.2
VCA2:N$6: VCA2:C2.2 VCA2:IC2.13 VCA2:IC5.13 VCA2:R6.1
VCA2:N$7: VCA2:D4.2 VCA2:IC2.6 VCA2:R14.2
VCA2:N$8: VCA2:D2.1 VCA2:IC2.11 VCA2:R23.1
VCA2:N$9: VCA2:C4.2 VCA2:IC2.4 VCA2:IC6.9 VCA2:R12.1
VCA2:N$11: VCA2:C6.1 VCA2:R17.1
VCA2:N$12: VCA2:IC2.7 VCA2:R16.2 VCA2:R17.2
VCA2:N$13: VCA2:C7.2 VCA2:IC2.5 VCA2:IC6.13 VCA2:R18.1
VCA2:N$14: VCA2:D2.2 VCA2:IC2.14 VCA2:R20.2
VCA2:N$17: VCA2:IC2.1 VCA2:R22.1
VCA2:N$19: VCA2:C5.1 VCA2:R11.1
VCA2:N$23: VCA2:IC2.10 VCA2:R7.2 VCA2:R11.2
VCA2:N$49: VCA2:C12.2 VCA2:IC2.12 VCA2:IC5.9 VCA2:R36.1
VCA3:IC2_1: VCA3:IC5.7 VCA3:R10.1 VCA3:R20.1
VCA3:IC2_2: VCA3:IC5.6 VCA3:R8.1 VCA3:R10.2
VCA3:IC2_3: VCA3:IC6.1 VCA3:R9.1 VCA3:R15.1
VCA3:IC2_4: VCA3:IC5.2 VCA3:R3.2 VCA3:R43.1
VCA3:IC2_5: VCA3:IC6.2 VCA3:R13.1 VCA3:R15.2
VCA3:IC2_6: VCA3:IC6.7 VCA3:R14.1 VCA3:R21.1
VCA3:IC2_7: VCA3:IC6.6 VCA3:R19.1 VCA3:R21.2
VCA3:IC2_11: VCA3:IC5.1 VCA3:R3.1 VCA3:R23.2
VCA3:N$1: VCA3:D4.1 VCA3:IC2.3 VCA3:R9.2
VCA3:N$2: VCA3:C1.1 VCA3:R5.1
VCA3:N$3: VCA3:C3.1 VCA3:R2.1
VCA3:N$4: VCA3:IC2.15 VCA3:R4.2 VCA3:R5.2
VCA3:N$5: VCA3:IC2.2 VCA3:R1.2 VCA3:R2.2
VCA3:N$6: VCA3:C2.2 VCA3:IC2.13 VCA3:IC5.13 VCA3:R6.1
VCA3:N$7: VCA3:D4.2 VCA3:IC2.6 VCA3:R14.2
VCA3:N$8: VCA3:D2.1 VCA3:IC2.11 VCA3:R23.1
VCA3:N$9: VCA3:C4.2 VCA3:IC2.4 VCA3:IC6.9 VCA3:R12.1
VCA3:N$11: VCA3:C6.1 VCA3:R17.1
VCA3:N$12: VCA3:IC2.7 VCA3:R16.2 VCA3:R17.2
VCA3:N$13: VCA3:C7.2 VCA3:IC2.5 VCA3:IC6.13 VCA3:R18.1
VCA3:N$14: VCA3:D2.2 VCA3:IC2.14 VCA3:R20.2
VCA3:N$17: VCA3:IC2.1 VCA3:R22.1
VCA3:N$19: VCA3:C5.1 VCA3:R11.1
VCA3:N$23: VCA3:IC2.10 VCA3:R7.2 VCA3:R11.2
VCA3:N$49: VCA3:C12.2 VCA3:IC2.12 VCA3:IC5.9 VCA3:R36.1
VCA4:IC2_1: VCA4:IC5.7 VCA4:R10.1 VCA4:R20.1
VCA4:IC2_2: VCA4:IC5.6 VCA4:R8.1 VCA4:R10.2
VCA4:IC2_3: VCA4:IC6.1 VCA4:R9.1 VCA4:R15.1
VCA4:IC2_4: VCA4:IC5.2 VCA4:R3.2 VCA4:R43.1
VCA4:IC2_5: VCA4:IC6.2 VCA4:R13.1 VCA4:R15.2
VCA4:IC2_6: VCA4:IC6.7 VCA4:R14.1 VCA4:R21.1
VCA4:IC2_7: VCA4:IC6.6 VCA4:R19.1 VCA4:R21.2
VCA4:IC2_11: VCA4:IC5.1 VCA4:R3.1 VCA4:R23.2
VCA4:N$1: VCA4:D4.1 VCA4:IC2.3 VCA4:R9.2
VCA4:N$2: VCA4:C1.1 VCA4:R5.1
VCA4:N$3: VCA4:C3.1 VCA4:R2.1
VCA4:N$4: VCA4:IC2.15 VCA4:R4.2 VCA4:R5.2
VCA4:N$5: VCA4:IC2.2 VCA4:R1.2 VCA4:R2.2
VCA4:N$6: VCA4:C2.2 VCA4:IC2.13 VCA4:IC5.13 VCA4:R6.1
VCA4:N$7: VCA4:D4.2 VCA4:IC2.6 VCA4:R14.2
VCA4:N$8: VCA4:D2.1 VCA4:IC2.11 VCA4:R23.1
VCA4:N$9: VCA4:C4.2 VCA4:IC2.4 VCA4:IC6.9 VCA4:R12.1
VCA4:N$11: VCA4:C6.1 VCA4:R17.1
VCA4:N$12: VCA4:IC2.7 VCA4:R16.2 VCA4:R17.2
VCA4:N$13: VCA4:C7.2 VCA4:IC2.5 VCA4:IC6.13 VCA4:R18.1
VCA4:N$14: VCA4:D2.2 VCA4:IC2.14 VCA4:R20.2
VCA4:N$17: VCA4:IC2.1 VCA4:R22.1
VCA4:N$19: VCA4:C5.1 VCA4:R11.1
VCA4:N$23: VCA4:IC2.10 VCA4:R7.2 VCA4:R11.2
VCA4:N$49: VCA4:C12.2 VCA4:IC2.12 VCA4:IC5.9 VCA4:R36.1

## Tracks (layer width: path | path; a pad name or v marks a point on that pad's centre or on a via)
+12V  (via drill 0.5, 0.6, 0.6 pad 0.61)
  Top 0.254: 105.1,2.6 Q7.3 | v100.02,16.5 100.02,15.86 99.38,15.23 97.79,15.23 97.16,14.59 96.7,14.59 96.29,14.19 96.84,13.64 96.84,12.69 97.16,12.37 98.75,12.37 99.06,12.05 99.06,11.21 R41.2 | 105.53,23.28 105.53,23.59 106.05,24.12 107,24.12 107.32,24.43 107.32,25.2
  Top 0.305: Q1.3 v67.16,6.08 | VCA2:C10.1 76.74,74.82 77.16,75.23 79.23,75.23 79.65,75.6 | VCA2:R22.2 86.36,74.92 85.73,75.23 80.02,75.23 79.65,75.6 | 79.65,75.6 79.65,78.78 79.38,79.04 78.74,79.04 v78.11,79.68 | v81.45,55.93 81.45,56.97 79.7,58.72 79.7,64.76 79.06,65.39 79.06,66.98 78.74,67.3 77.7,67.3 v77.64,67.36 | v82.08,39.74 82.08,37.83 v82.72,37.2 | Q5.3 96.29,14.19 | 99.06,2.21 v99.06,3.48 | v99.06,3.48 99.06,3.86 IC2.4 99.11,3.52 v99.06,3.48 | 99.06,2.21 99.38,1.89 105.11,1.89 105.11,2.29 Q7.3 105.43,2.27 C2.1 | Q9.2 107.36,29.56 108.59,30.78 108.59,35.55 108.91,35.86 | 108.91,35.86 108.59,36.18 108.59,39.67 107.95,40.31 107.95,46.98 108.33,47.36 109.53,47.36 | 108.91,35.86 110.15,35.86 VCA4:IC5.4 | VCA3:C14.1 110.81,47.61 109.83,47.61 VCA3:IC5.4 | R42.2 105.53,23.28 | 107.32,24.88 Q9.2 | 107.32,25.2 Q9.2 | 99.06,2.21 98.75,1.89 87,1.89 86.68,2.21 86.68,3.33 IC1.4 86.68,3.63 86.68,4.43 86.05,5.07 81.6,5.07 81.52,4.98 Q4.3 78.19,5.07 v74.62,5.07 74.53,4.98 Q3.3 74.4,4.92 Q2.3 70.56,4.82 v70.49,4.75 70.49,4.11 71.21,3.39 C1.1 | C6.1 74.68,2.91 v74.62,2.84
  Top 0.406: 91.66,95.17 VCA1:IC2.16 91.74,95.13 VCA1:C8.1 | v109.76,89.08 VCA1:IC5.4 | VCA1:R22.2 v88.17,97.02 | v78.64,89.08 VCA1:IC6.4 | v69.44,89.08 VCA1:C10.1 70.15,91.7 70.71,92.26 70.71,93.53 71.34,94.48 71.98,94.48 72.29,94.8 | VCA1:C8.1 v91.66,97.02 91.66,97.1 VCA1:C8.1 | VCA2:IC2.16 v92.56,72.44 92.56,72.76 92.24,73.07 92.24,73.93 VCA2:C8.1 | 79.34,47.39 VCA3:IC6.4 80.5,47.36 80.81,47.67 80.81,48.31 81.13,48.63 82.72,48.63 v83.67,47.67 | 92.54,52.54 VCA3:IC2.16 92.7,52.53 VCA3:C8.1 | v77.64,67.36 VCA2:IC6.4 | 92.56,34.42 VCA4:C10.1 92.64,32.79 VCA4:IC2.16 | VCA4:IC5.4 110.33,35.85 VCA4:C14.1 | IC4.8 111.88,54.34 v112.88,54.34 113.52,53.71 113.52,49.36 112.72,48.56 111.75,48.56 VCA3:C14.1 | VCA4:IC6.4 v78.91,27.35 | VCA4:IC5.4 110.87,35.77 110.89,35.75 | 110.23,35.75 VCA4:IC5.4 | 109.63,47.41 VCA3:IC5.4 109.53,47.36 | VCA3:C10.1 81.46,55.92 v81.45,55.93 85.58,55.93 86.21,55.29 v86.21,54.34 VCA3:R22.2 | 72.29,94.8 72.61,94.48 73.88,94.48 75.15,93.21 75.15,84.02 73.35,82.22 v73.35,79.68 | 72.29,94.8 72.29,95.67 VCA1:C14.1 | Q8.3 Q6.3 Q5.3 | 87.27,34.87 VCA4:R22.2 v87.16,34.97 87.03,34.84 VCA4:C8.1 | VCA2:R22.2 | VCA2:C10.1 76.7,74.01 v76.69,74.03 | VCA2:C14.1 113.02,68.23 113.03,68.25 | R42.2 105.51,23.07 v105.41,23.16
  Bottom 0.305: v73.35,79.68 v78.11,79.68 | VCA4:C8.1 81.92,34.79 81.92,33.96 80.65,32.69 80.65,27.61 80.39,27.35 v78.91,27.35 | v70.49,4.75 69.54,4.75 68.27,6.02 67.22,6.02 v67.16,6.08 | VCA2:C14.1 113.67,67.76 113.67,55.13 v112.88,54.34 | v105.41,23.16 101.92,23.16 100.02,21.26 v100.02,16.5 | v99.06,3.48 99.06,6.02 97.79,7.29 97.79,10.78 98.11,11.1 98.95,11.1 R41.2 | v74.62,2.84 v74.62,5.07
  Bottom 0.406: v69.44,89.08 v78.64,89.08 79.28,89.08 79.91,88.45 83.72,88.45 85.31,89.72 85.31,96.7 85.63,97.02 v88.17,97.02 v91.66,97.02 91.66,97.65 91.98,97.97 109.76,97.97 111.66,96.07 111.66,90.03 110.71,89.08 v109.76,89.08 | v76.69,74.03 76.69,73.48 76.84,73.33 77.64,72.44 v77.64,67.36 | VCA2:R22.2 86.21,73.95 86.21,72.76 86.53,72.44 v92.56,72.44 100.59,72.44 100.97,72.06 100.97,69.84 101.29,69.52 106.68,69.52 107.64,68.57 107.64,67.61 108.27,66.98 109.7,66.98 VCA2:IC5.4 | v86.21,54.34 86.21,53.39 87.16,52.44 92.61,52.44 VCA3:IC2.16 | v87.16,34.97 87.22,34.91 91.13,34.91 91.76,34.28 92.58,34.28 VCA4:C10.1 | v82.08,39.74 82.72,39.74 83.04,40.05 83.04,43.97 84.62,45.55 84.62,46.72 v83.67,47.67 83.35,47.99 83.35,52.12 81.45,54.02 v81.45,55.93 | VCA4:C8.1 81.77,34.94 81.77,36.34 82.62,37.2 v82.72,37.2 | 109.83,66.98 VCA2:IC5.4 | VCA2:IC5.4 110.87,67.04 112.08,68.25 112.86,68.25 VCA2:C14.1
  other vias: 81.87,34.84 86.36,74.12 92.63,52.45 92.64,34.34 112.88,68.23 109.77,67.04 99.01,11.16
-12V  (via drill 0.5)
  Top 0.254: v91.76,2.84 v91.76,4.11 91.75,4.11 C4.1
  Top 0.305: R43.1 110.22,5.98 v110.18,5.7 | 101.92,29.2 105.1,29.2 107.32,31.42 107.32,34.91 106.37,35.86 105.14,35.86 | 101.92,29.2 101.6,29.51 101.6,30.28 VCA4:C13.1 | 101.92,29.2 101.6,28.88 101.6,25.07 102.24,24.43 102.24,21.26 | 102.24,21.26 v102.51,20.94 105.29,20.94 Q10.2 | VCA4:C9.2 95.5,22.29 95.89,21.89 98.75,21.89 99.7,20.94 101.92,20.94 102.24,21.26 | 91.76,4.43 v91.76,4.11 91.69,4.04 C5.1 | IC1.11 86.36,8.52 86.36,7.29 86.68,6.97 90.81,6.97 91.13,6.65 91.13,4.73 C4.1
  Top 0.406: VCA1:IC2.9 97.69,86.22 98.33,86.86 98.33,88.45 98.96,89.08 VCA1:IC5.11 105.95,89.08 106.27,89.4 106.27,93.21 106.9,93.84 108.81,93.84 109.12,94.16 109.12,99.24 107.85,100.51 85.95,100.51 84.99,99.56 VCA1:C9.2 79.84,99.95 79.28,100.51 76.73,100.51 76.12,99.9 | VCA2:C11.1 94.15,63.23 93.83,63.55 v92.56,63.55 VCA2:IC2.9 | 92.64,43.55 VCA3:IC2.9 | 74.08,47.36 VCA3:IC6.11 | VCA1:IC6.11 71.66,89.08 70.62,88.03 66.81,88.03 | 66.81,88.03 65.94,87.18 65.94,81.78 66.9,80.83 v67.53,80.83 | VCA3:IC2.9 93.5,43.56 94.15,42.91 95.59,42.91 VCA3:C9.2 95.6,42.73 96.37,41.96 98.59,41.96 99.23,42.59 99.23,46.09 99.55,46.4 101.77,46.4 102.09,46.72 102.09,47.31 VCA3:C11.1 VCA3:IC5.11 104.38,47.36 | VCA3:IC6.11 72.26,47.34 VCA3:C13.1 | VCA3:IC2.9 93.18,43.56 v92.88,43.55 | VCA4:IC2.9 92.99,23.54 94.15,23.54 94.47,23.23 VCA4:C9.2 95.42,23.15 | 95.1,63.15 VCA2:C11.1 | VCA1:C11.1 69.99,97.89 | 76.12,99.9 76.12,95.81 VCA1:C13.1 | 76.12,99.9 75.52,100.51 71.66,100.51 71.23,100.08 D3.3 71.07,98.29 70.39,98.29 69.99,97.89 | VCA2:IC6.11 71.29,67.36 70.65,66.72 68.43,66.72 | 68.43,66.72 68.11,67.04 68.11,68.11 VCA2:C13.1 | 98.91,59.74 98.91,60.93 VCA2:C9.2 98.91,61.09 98.91,61.96 98.59,62.28 | VCA2:C11.1 95.18,62.52 95.42,62.28 98.59,62.28 | 98.59,62.28 98.91,62.6 98.91,63.55 100.5,65.14 101.45,65.14 103.36,67.04 VCA2:IC5.11 105.26,67.04 | VCA3:IC6.11 73.84,47.34 v73.83,47.36 | 66.81,88.03 65.94,88.89 65.94,97.68 66.58,98.26 69.63,98.26 69.99,97.89 | v104.57,35.77 104.6,35.8 104.77,35.8 VCA4:IC5.11 105.14,35.86 | 68.43,66.72 68.11,66.41 68.11,59.1 68.75,58.47 72.56,58.47 73.19,59.1 v73.19,60.37
  Top 0.406: 98.91,59.74 99.38,59.27 v103.36,59.27 107.7,59.27 IC4.4 | 98.91,59.74 98.59,59.42 v97.32,59.42 | VCA4:C11.1 v72.88,27.35 VCA4:IC6.11 73.51,27.35
  Bottom 0.254: v102.51,20.94 102.46,11.68 102.46,7.51 102.24,7.29 | 99.06,8.84 IC2.11
  Bottom 0.305: 68.43,68.15 VCA2:C13.1 68.27,67.99 67.31,67.99 66.67,68.63 66.67,79.11 67.53,79.96 v67.53,80.83 | C3.1 v72.88,27.35 | v110.18,5.7 102.88,5.7 | 99.06,9.06 IC2.11 99.06,8.75 99.06,7.61 99.38,7.29 102.24,7.29 102.56,6.97 102.56,6.02 102.88,5.7 | 86.53,8.39 IC1.11 86.68,8.53 | v91.76,2.84 94.94,2.84 95.25,2.53 102.24,2.53 102.56,2.84 102.56,5.38 102.88,5.7
  Bottom 0.406: v92.56,63.55 92.56,63.44 | 78.91,38.15 92.24,38.15 93.2,39.1 | VCA3:IC5.11 104.38,47.36 102.72,47.36 102.09,47.99 102.09,50.85 103.36,52.12 v103.36,59.27 | v104.57,35.77 98.43,35.77 96.05,38.15 94.15,38.15 93.2,39.1 | v73.19,60.37 75.42,60.37 77.64,58.47 86.85,58.47 89.07,60.69 93.61,60.69 94.88,59.42 v97.32,59.42 | 78.91,38.15 77.96,38.78 77.96,42.91 77.32,43.55 72.88,43.55 72.24,44.18 72.24,47.09 VCA3:C13.1 | 78.91,38.15 77.96,37.2 77.96,35.61 79.23,34.34 79.23,29.26 78.91,28.94 77,28.94 75.73,27.35 v72.88,27.35 | 93.2,39.1 93.2,43.23 v92.88,43.55
  other vias: 68.41,68.13 104.35,47.33 72.12,47.21 86.53,8.68 99.11,8.79 72.88,21.88
CLAMP_REF  (via drill 0.5)
  Top 0.305: 93.74,18.72 92.71,18.72 91.76,19.67 90.86,19.67 VCA4:D4.3
  Top 0.406: 89.9,60.25 VCA2:D4.3 | VCA2:D4.3 89.44,59.05 89.7,58.79 | 95.1,59.1 95.1,60.95 VCA2:D2.3 | IC4.7 IC4.6 109.39,54.29 v109.39,53.71 | VCA1:D2.3 92.03,81.31 | VCA2:D4.3 89.07,60.45 89.07,75.4 89.54,75.87 91.13,75.87 91.44,76.49 91.44,80.73 92.03,81.31 | v108.44,57.52 106.85,57.52 105.9,58.47 95.74,58.47 95.1,59.1 | 89.7,58.79 89.7,40.6 VCA3:D4.3 90.17,39.93 90.17,38.4 90.49,38.09 | 95.1,59.1 90.02,59.1 89.7,58.79 | 93.74,18.72 VCA4:D2.3 | VCA3:D2.3 95.03,38.5 94.62,38.09 90.49,38.09 | 90.49,38.09 90.17,37.77 90.17,21 VCA4:D4.3 | VCA1:D4.3 91.76,81.82 91.76,81.58 92.03,81.31
  Bottom 0.406: v108.44,57.52 108.75,57.52 109.39,56.88 v109.39,53.71
CV_AA  (via drill 0.5)  (1 unrouted)
  Top 0.406: VCA1:R13.2 v82.08,80.06 | JP10.1 24.8,77.43 22.55,79.68 4.45,79.68 3.18,80.95 3.18,89.84 1.27,91.74 1.27,96.57 CV_AA.P$3
  Bottom 0.305: v82.08,80.06 85.99,80.06 87.95,78.09 91.76,78.09 92.4,77.46 93.9,77.46 JP1.1
CV_AB  (via drill 0.5)  (1 unrouted)
  Top 0.406: VCA1:R19.2 v84.99,81.78 | v96.21,80.95 96.21,77.69 JP1.2 | JP10.2 31.72,78.45 30.8,79.36 24.77,79.36 21.91,82.22 21.91,95.12 CV_AB.P$3
  Bottom 0.406: v84.99,81.78 95.47,81.78 95.47,81.68 v96.21,80.95
CV_AC  (1 unrouted)
  Top 0.406: VCA1:R43.2 99.48,82.93 98.96,82.41 98.96,78.74 JP1.3 | CV_AC.P$3 26.45,89.11 28.58,86.98 28.58,81.9 29.85,80.63 32.71,80.63 33.98,79.36 34.26,79.08 | 34.26,79.08 34.3,79.04 | JP10.3 34.26,79.08
CV_AD  (1 unrouted)
  Top 0.406: VCA1:R8.2 107.54,82.75 107.54,81.78 106.9,81.14 102.14,81.14 101.5,80.51 101.5,78.74 JP1.4 | JP10.4 36.8,79.64 37.79,80.63 44.14,80.63 46.99,83.49 46.99,90.79 48.9,92.7 48.9,96.71 CV_AD.P$3
CV_BA  (1 unrouted)
  Top 0.305: VCA2:R13.2 98.06,75.82 98.75,76.19 103.83,76.19 104.14,76.5 104.14,77.38 JP1.5
  Bottom 0.406: JP10.5 39.34,78.76 38.11,80 3.18,80 0.96,82.22 0.96,84.01 CV_BA.P$3
CV_BB  (1 unrouted)
  Top 0.406: VCA2:R19.2 105.16,74.98 105.41,75.23 105.41,76.82 106.05,77.46 106.6,77.46 JP1.6
  Bottom 0.406: JP10.6 41.88,78.76 40.01,80.63 25.09,80.63 23.5,82.22 23.5,84.01 CV_BB.P$3
CV_BC  (1 unrouted)
  Top 0.406: JP1.7 109.17,75.1 VCA2:R43.2
  Bottom 0.406: JP10.7 44.42,80.03 43.19,81.27 27.63,81.27 26.36,83.17 26.36,84.01 CV_BC.P$3
CV_BD  (1 unrouted)
  Top 0.406: JP1.8 111.61,77.34 VCA2:R8.2 | JP10.8 46.96,79.96 48.9,81.9 48.9,84.01 CV_BD.P$3
CV_CA  (1 unrouted)
  Top 0.406: VCA3:R13.2 65.88,76.66 66.68,77.46 68.16,77.46 JP3.1 | CV_CA.P$3 1.05,74.69 3.18,76.82 3.18,77.16 JP2.1
CV_CB  (1 unrouted)
  Top 0.305: VCA3:R19.2 69.59,75.28 70.81,76.19 70.81,77.35 JP3.2
  Top 0.406: CV_CB.P$3 23.5,71.31 23.5,69.84 21.6,67.93 3.5,67.93 2.86,68.57 2.86,73.33 5.98,76.45 JP2.2
CV_CC  (1 unrouted)
  Top 0.305: VCA3:R43.2 71.7,76.13 72.08,76.5 73.03,76.5 73.35,76.82 73.35,77.35 JP3.3
  Top 0.406: JP2.3 8.52,74.97 9.53,73.96 25.41,73.96 26.36,73.01 26.36,71.48 CV_CC.P$3
CV_CD  (1 unrouted)
  Top 0.305: VCA3:R8.2 73.83,76.03 73.98,76.19 75.57,76.19 75.89,76.5 75.89,77.35 JP3.4
  Top 0.406: JP2.4 11.06,75.93 11.75,75.23 46.99,75.23 48.9,73.33 48.9,71.48 CV_CD.P$3
CV_DA  (via drill 0.5)  (1 unrouted)
  Bottom 0.406: JP3.5 78.43,77.35 78.43,76.5 77.79,75.87 71.44,75.87 70.02,74.44 70.02,64.18 69.07,63.23 68.11,63.23 67.16,62.28 67.16,58.47 69.38,56.25 69.38,42.28 70.97,40.69 72.02,40.69 72.39,40.31 72.39,35.55 73.03,34.91 73.79,34.91 VCA4:R13.2 | JP2.5 13.6,75.81 12.71,74.92 5.08,74.92 2.54,72.38 2.54,62.53 0.96,60.95 0.96,58.78 CV_DA.P$3
  other vias: 73.83,34.87
CV_DB  (via drill 0.5)  (1 unrouted)
  Top 0.406: VCA4:R19.2 v76.37,34.97
  Bottom 0.406: JP3.6 80.65,77.12 80.65,75.87 80.02,75.23 72.08,75.23 70.65,73.81 70.65,63.55 69.7,62.6 68.75,62.6 68.11,61.96 68.11,58.79 70.02,56.88 70.02,42.59 71.29,41.32 72.65,41.32 73.35,40.63 73.35,36.82 73.98,36.18 76.2,36.18 76.37,36.02 v76.37,34.97 | JP2.6 16.14,74.97 17.15,73.96 24.77,73.96 25.09,73.65 25.09,64.12 23.5,62.53 23.5,58.78 CV_DB.P$3
CV_DC  (via drill 0.5)  (1 unrouted)
  Top 0.406: VCA4:R43.2 84.2,79.42 83.51,78.73 83.51,77.44 JP3.7
  Bottom 0.406: JP2.7 18.68,75.61 19.69,74.6 27.31,74.6 27.95,73.65 27.95,63.49 26.36,61.9 26.36,58.78 CV_DC.P$3
  other vias: 88.54,79.42
CV_DD  (1 unrouted)
  Top 0.406: JP3.8 88.34,77.4 VCA4:R8.2
  Bottom 0.406: CV_DD.P$3 48.99,62.76 46.99,64.76 46.99,74.28 46.04,75.23 21.91,75.23 21.22,75.93 JP2.8
GND  (via drill 0.5, 0.5 pad 0.61, 0.6 pad 0.61)  (1 unrouted)
  Top 0.254: 75.89,19.04 73.03,19.04 72.71,19.35 v72.71,19.99 | J3.3 76.45,10.07 75.89,9.51 75.26,9.51 R12.1 | VCA4:C14.2 112.57,37.6 113.35,36.82 113.35,31.1 113.67,30.78 113.67,28.14 JP8.4 | 100.33,3.64 v100.33,3.48 | IC2.12 97.84,9.15 | v93.67,4.11 93.5,4.11 C4.2
  Top 0.305: 72.88,26.08 v74.09,26.08 74.78,26.08 75.1,26.4 75.1,28.31 74.78,28.62 VCA4:IC6.10 | VCA4:C11.2 69.78,28.38 70.02,28.62 v72.88,28.62 | v107.04,21.15 107.04,20.78 Q10.1 | 78.25,74.01 78.25,73.47 77.79,73.01 75.57,73.01 v74.62,72.06 | v86.11,63.55 86.05,63.48 86.05,59.68 85.73,59.36 81.6,59.36 81.28,59.68 VCA2:C6.2 v81.28,60.63 | 72.97,68.63 VCA2:IC6.10 v71.55,68.63 | v74.62,65.07 74.3,64.76 74.3,62.53 v73.35,61.58 | VCA3:C6.2 82.99,42.33 83.19,42.53 85.83,42.53 v86.85,43.55 | VCA3:C1.2 98.64,51.95 98.43,51.74 98.43,47.69 98.78,47.33 | 84.15,13 R18.1 | v84.36,22.7 84.34,22.7 VCA4:C6.2 | 87.48,23.54 87.65,23.54 VCA4:IC2.8 | 93.73,4.18 v93.67,4.11 93.44,3.88 C5.2 | 97.84,3.84 IC2.3 97.84,3.52 v97.79,3.48 97.79,3.8 | 97.84,3.84 97.79,3.8 | C2.2 109.56,2.19 v109.54,2.21 | 97.84,9.15 97.79,9.19 | IC2.10 100.38,9.15 v100.33,9.19 | v100.33,9.19 100.33,8.56 | 105.46,25.43 105.46,25.1 v105.5,25.06 | v100.97,24.12 100.97,28.56 v100.65,28.88 | 104.14,34.5 106.14,34.5 106.68,33.96 106.68,31.74 105.1,30.15 103.98,30.15 103.5,30.31 v103.5,30.16 v103.51,30.15 | v111.45,46.66 111.6,46.66 VCA3:C14.2 | IC2.12 97.84,7.56 98.11,7.29 100.02,7.29 100.33,7.61 v100.33,9.19 | C3.2 72.85,20.13 v72.71,19.99 73.03,20.31 | 75.89,19.04 76.45,18.47 J3.3 | R1.1 v72.71,9.51 v72.71,6.34 | R24.1 80.92,11.47 v80.65,11.42 | 97.84,3.84 97.84,4.79 98.11,5.07 100.02,5.07 100.33,4.75 100.33,3.64 IC2.5 | J4.3 103.83,13.84 103.83,13 103.19,12.37 v101.6,12.37 | C6.2 72.65,2.91 v73.03,2.84 | C1.2 69.48,2.91 v69.54,2.84 | 97.79,3.8 97.79,4.75 | U$1.1 107.71,5.32 106.37,6.65 v105.73,6.65
  Top 0.406: VCA1:C13.2 78.09,95.9 VCA1:C1.2 VCA1:C9.1 | VCA1:C13.2 v77.69,95.75 | 72.93,90.35 VCA1:IC6.10 v71.98,90.35 | 77.77,95.67 77.85,95.75 | VCA1:C13.2 VCA1:C3.2 79.36,94.31 79.7,93.97 80.97,93.97 81.28,93.65 81.28,88.25 v82.55,86.98 | 72.93,87.81 VCA1:IC6.12 v71.98,87.81 | 106.58,94.56 VCA1:C6.2 105.63,94.08 105.63,90.99 105,90.35 v103.41,90.35 VCA1:IC5.10 | VCA1:C8.2 v93.57,97.02 98.23,97.02 99.06,96.19 99.06,95.24 99.7,94.6 100.65,94.6 v100.97,94.92 | 68.41,95.59 VCA1:C11.2 | v68.17,95.75 VCA1:C11.2 | VCA1:C11.2 68.48,95.75 | VCA1:C10.2 v69.44,93.53 | v69.44,93.53 69.44,93.21 | VCA2:IC2.8 v86.11,63.55 | VCA2:IC5.10 v104.31,68.31 104.63,68.31 | v71.61,66.09 VCA2:IC6.12 72.24,66.09 | 94.47,74.34 VCA2:C1.2 94.23,74.67 93.67,75.23 92.71,75.23 92.4,75.55 | VCA2:C11.2 v97.01,63.23 96.69,63.23 | 70.24,68.13 VCA2:C13.2 70.65,68.63 v71.55,68.63 | 112.83,66.62 VCA2:C14.2 112.88,66.51 v112.92,66.51 | VCA2:C6.2 81.28,60.37 | VCA3:IC6.10 73.52,48.62 | 73.52,48.62 v73.55,48.63 70.65,48.63 70.3,48.27 70.3,47.22 VCA3:C13.2 | VCA3:IC6.12 73.2,46.08 v73.83,46.09 | VCA3:IC2.8 86.86,43.56 v86.85,43.55 87.16,43.55 | VCA3:IC5.10 103.7,48.6 v103.67,48.63 | v103.67,48.63 103.99,48.63 | D3.2 D3.1 73.43,97.47 v73.83,97.49 73.88,97.65 | v97.32,42.93 VCA3:C9.1 97.4,42.85 98.11,42.85 98.43,43.17 98.43,46.98 98.78,47.33 VCA3:C11.2 | v78.59,74.03 78.25,74.01 VCA2:C10.2 VCA2:C3.2 | 79.84,54.34 v79.76,54.36 | 73.51,48.63 73.52,48.62 | 87.48,23.54 v87.16,23.54 87.1,23.48 86.05,23.48 85.27,22.7 v84.36,22.7 | VCA4:C10.2 v94.47,34.34 | v72.88,28.62 VCA4:IC6.10 | 72.88,26.08 72.56,26.08 | VCA4:C6.2 84.32,22.35 | VCA4:C9.1 v97.32,23.23
  Top 0.406: VCA4:C14.2 112.4,37.6 v112.39,37.6 | 105.39,24.86 v105.5,25.06 | VCA4:IC5.12 104.44,34.5 | 104.44,34.5 104.74,34.5 | VCA3:IC5.12 104.02,46.06 v103.67,46.09 104.63,46.09 | v85.95,86.22 VCA1:IC2.8 | VCA2:C5.2 v98.59,66.72 98.59,66.41 | 100.5,47.36 100.5,47.67 101.13,48.31 103.36,48.31 v103.67,48.63 | VCA3:C5.2 96.7,40.67 v96.69,40.69 | v96.69,40.69 97.01,40.69 | VCA3:C10.2 80.24,55.86 v79.86,55.93 | 104.44,34.5 104.4,34.5 | VCA4:IC5.10 103.83,37.04 103.36,36.56 103.36,34.97 103.83,34.5 104.14,34.5 104.4,34.5 | VCA4:C1.2 v96.69,36.24 v96.69,40.69 | 104.4,34.5 v105.06,34.52 104.97,34.52 105.02,34.47 | VCA2:C8.2 v90.34,74.03 89.86,73.54 v89.86,70.47 | VCA2:C8.2 90.66,74.03 | R18.1 v83.99,13.07 | VCA4:C3.2 v80.14,33.47 v80.14,34.84 VCA4:C8.2 80.26,34.84 | VCA2:C8.2 91.29,75.23 92.08,75.23 92.4,75.55 | VCA2:C3.2 | v69.44,93.53 69.44,94.38 69.22,94.6 68.58,94.6 68.27,94.92 68.27,95.72 VCA1:C11.2 | VCA2:IC5.12 103.89,65.77 v104.14,65.71 | VCA1:C5.2 103.41,87.81 | 103.41,87.81 VCA1:IC5.12 | 103.41,87.81 103.41,87.83 v103.51,87.78 | VCA4:C13.2 103.5,30.31 | Q9.1 105.46,25.43 105.41,24.75 | 92.4,75.55 92.4,80 v92.71,80.31 | Q10.1 109.05,20.98 JP8.7 | VCA1:C14.2 74.12,95.51 v73.88,95.75 VCA1:C14.2
  Bottom 0.305: v74.62,72.06 74.62,66.34 74.3,66.03 | 74.3,66.03 71.67,66.03 v71.61,66.09 71.61,68.05 v71.55,68.63 | v81.28,60.63 80.97,60.63 80.33,61.26 73.66,61.26 v73.35,61.58 | v74.62,65.07 74.62,65.71 74.3,66.03 | v80.14,33.47 80.14,28.69 79.7,28.24 77.79,28.24 75.57,26.02 74.15,26.02 v74.09,26.08 | v100.97,24.12 108.81,24.12 JP8.5 | v103.51,30.15 100.97,30.15 100.65,29.83 v100.65,28.88 | v72.71,9.51 74.93,9.51 R12.1 | J3.3 77.71,12.69 78.43,12.69 79.7,11.42 v80.65,11.42 83.19,11.42 83.99,12.21 v83.99,13.07 | v97.79,3.48 94.94,3.48 94.3,4.11 v93.67,4.11
  Bottom 0.406: v100.97,94.92 106.22,94.92 VCA1:C6.2 | v104.31,68.31 104.14,68.15 v104.14,65.71 111.77,65.71 112.57,66.51 v112.92,66.51 | v98.59,66.72 98.59,68.08 97.16,69.52 90.81,69.52 v89.86,70.47 | v103.51,87.78 103.51,90.25 v103.41,90.35 | v85.95,86.22 85.53,86.22 84.78,86.98 v82.55,86.98 | VCA4:IC5.12 v105.06,34.52
  other vias: 97.01,61.01 82.18,42.25 90.97,54.02 98.02,20.88 98.66,53.92 106.34,94.8 75.42,9.68 68.43,28.31 69.07,11.8 76.37,2.91 81.77,7.67 80.81,3.86 112.08,2.84 112.72,16.81 107.64,16.5 91.13,21.58 91.13,31.74 100.65,34.91 100.97,36.82 91.13,37.13 88.9,37.13 93.98,53.64 100.97,57.45 109.22,61.58 97.16,55.87 110.49,79.36 110.49,81.58 100.33,81.58 71.12,80.31 74.62,80.95 69.22,82.85 112.72,99.05 101.29,99.05 88.27,93.33 67,97.14 87,80.63 82.24,78.73 111.13,30.78 108.59,10.46 68.11,3.54 65.57,2.27 67,99.68 103.51,62.22 90.81,58.09 88.27,58.09 98.75,49.52 112.72,58.09 112.72,55.55 97.48,38.4 91.44,39.04
  pour Bottom: 120.5,108.63 62.08,108.63 62.08,-3.13 120.5,-3.13
  pour Bottom: -2.62,105.69 54.53,105.69 54.53,-4.8 -2.62,-4.8
  pour Top: 121.77,107.36 63.35,107.36 63.35,-4.4 121.77,-4.4
IN_A  (via drill 0.5)  (2 unrouted)
  Top 0.406: IN_A.P$3 1.05,15.45 2.54,13.96 6.57,13.96 J1.5 6.6,10.85 8.26,9.19 U2.P1
  Bottom 0.254: J3.5 71.44,13.87 71.44,12.05 72.08,11.42 72.83,11.42 R1.2
  Bottom 0.305: IC1.3 85.09,3.64 85.09,4.43 84.78,4.75 76.52,4.75 76.2,5.07 76.2,8.24 75.89,8.56 72.08,8.56 71.44,9.19 71.44,10.78 72.08,11.42
  other vias: 85.26,3.48 72.88,11.38
IN_B  (via drill 0.5)  (2 unrouted)
  Top 0.305: v75.25,11.42 75.29,11.38 R12.2 75.25,11.54 75.25,12.37 74.93,12.69 74.3,12.69 73.98,13 73.98,13.87 J3.4
  Top 0.406: J1.4 9.14,16.43 10.16,17.45 22.55,17.45 23.5,18.4 23.5,20.51 IN_B.P$3
  Bottom 0.305: IC1.5 87.63,3.64 87.63,5.07 87.32,5.38 79.06,5.38 78.74,5.7 78.74,9.19 76.52,11.42 v75.25,11.42
  other vias: 87.8,3.48
IN_C  (via drill 0.5)  (3 unrouted)
  Top 0.406: J1.2 14.22,15.16 14.93,15.86 25.72,15.86 26.36,16.5 26.36,20.51 IN_C.P$3
  Bottom 0.305: 79.06,14.01 79.06,14.91 79.38,15.23 83.63,15.23 R18.2 | 83.82,15.03 R18.2 | R18.2 85.77,14.87 86.36,14.59 86.36,10.78 87.63,9.51 87.63,8.84 IC1.10
  other vias: 83.99,14.87 87.8,8.68
IN_D  (via drill 0.5)  (3 unrouted)
  Top 0.305: v85.41,11.1 85.03,11.48 R24.2 82.24,11.54 | 81.62,13.94 81.62,12.99 82.24,12.37 82.24,11.54 | 82.24,11.42 82.24,11.54
  Top 0.406: J1.1 29.19,13.93 33.34,18.08 46.99,18.08 48.9,19.99 48.9,20.51 IN_D.P$3
  Bottom 0.305: v85.41,11.1 85.41,8.83 IC1.12
  other vias: 85.26,8.68
LED_1  (1 unrouted)
  Top 0.305: R26.2 67.8,18.72 67.8,19.1 65.89,21 65.89,29.89 66.84,30.85 66.84,32.36 JP5.1
  Top 0.406: JP4.1
  Bottom 0.406: LED1.A 4.7,38.47 8.58,34.59 8.58,31.42 7.94,30.78 2.54,30.78 1.91,31.42 JP4.1
LED_2  (via drill 0.5)  (1 unrouted)
  Top 0.305: R28.2 65.89,20.05 65.26,20.69 65.26,34.34 65.57,34.66 66.54,34.66 JP5.2
  Top 0.406: JP4.2 2.7,35.07 3.81,36.18 v8.89,36.18
  Bottom 0.406: v8.89,36.18 8.89,40.31 10.16,41.58 10.16,44.75 11.43,46.02 17.37,46.02 LED2.A
LED_3  (via drill 0.5)  (1 unrouted)
  Top 0.406: JP4.3 9.05,37.61 10.8,35.86 10.8,32.05 11.75,30.78 33.66,30.78 34.61,31.74 34.61,39.99 30.17,44.44 30.17,45.92 LED3.A
  Bottom 0.305: R30.2 66.21,15.61 65.89,15.92 65.89,28.94 68.11,31.16 68.11,36.56 67.66,37.33 66.95,37.33 JP5.3
  other vias: 66.21,14.87
LED_4  (via drill 0.5)  (1 unrouted)
  Top 0.305: 66.71,39.87 JP5.4 66.84,39.71 66.84,39.42 68.11,38.15 68.11,31.16 66.53,29.58 66.53,24.5 67.16,23.86 67.16,23.54 R32.2
  Top 0.406: JP4.4 6.83,40.15 v6.99,39.99
  Bottom 0.406: LED4.A 42.8,47.05 40.65,49.2 10.16,49.2 8.89,47.93 8.89,41.9 v6.99,39.99
LED_5  (1 unrouted)
  Top 0.305: R34.2 69.17,38.05 68.11,39.1 68.11,41.64 67.34,42.41 66.95,42.41 JP5.5
  Bottom 0.406: LED5.A 4.7,36.89 3.5,38.09 3.5,42.53 3.34,42.69 JP4.5
LED_6  (1 unrouted)
  Top 0.305: R36.2 69.8,38.68 68.75,39.74 68.75,41.96 68.43,42.28 68.43,44.5 68.11,44.82 67.41,44.82 JP5.6
  Top 0.406: LED6.A 17.4,40.7 13.98,44.12 3.81,44.12 2.86,45.07 2.07,45.07 JP4.6
LED_7  (via drill 0.5)  (1 unrouted)
  Top 0.406: JP4.7 4.29,47.77 5.08,48.56 22.87,48.56 29.85,41.58 29.85,33.54 LED7.A
  Bottom 0.305: JP5.7 67.13,47.67 67.48,47.36 68.11,46.72 68.11,37.83 68.75,36.88 68.75,30.85 66.53,28.62 66.53,19.42 68.53,17.41 68.53,14.97 R38.2
  other vias: 68.75,14.87
LED_8  (1 unrouted)
  Top 0.305: LED8.A 42.2,33.3 38.74,29.83 1.59,29.83 0.64,30.78 0.64,49.04 JP4.8
  Top 0.406: R40.2 66.63,50.67 JP5.8
N$3  (via drill 0.5)  (2 unrouted)
  Top 0.305: v70.97,21.32 70.97,16.02 69.85,14.91 69.85,13 70.49,12.37 70.49,11.54 R27.1 | IC1.7 IC1.6 89.07,3.64 89.22,3.8
  Top 0.406: v82.99,60.37 VCA2:R16.1 | VCA2:R1.1 83.15,69.79 v82.72,69.58 | VCA2:R7.1 83.09,60.48 | VCA2:R4.1 98.96,71.54 98.91,71.17 | 82.99,60.64 83.04,60.69
  Bottom 0.305: 77,34.02 71.92,34.02 71.29,33.39 71.29,29.04 70.49,28.24 70.49,21.8 v70.97,21.32 | IC1.6 88.11,2.53 80.02,2.53 78.43,4.11 76.2,4.11 75.57,4.75 75.57,7.61 75.25,7.92 71.12,7.92 70.49,8.56 70.49,11.21 R27.1 70.69,11.42
  Bottom 0.406: v82.72,69.58 82.72,67.36 82.99,67.09 82.99,63.41 82.18,62.6 | VCA2:R1.1 84.56,69.58 87.7,69.58 88.9,71.42 98.49,71.42 VCA2:R4.1 | 82.18,62.6 71.61,62.6 70.34,61.33 70.34,58.47 71.29,57.52 71.29,43.23 71.92,42.59 75.73,42.59 77.32,41.01 77.32,34.34 77,34.02 | v82.99,60.37 82.99,61.78 82.18,62.6
  other vias: 84.36,69.79 70.65,11.38 98.96,71.27 89.07,3.48
N$4  (via drill 0.5)
  Top 0.305: R26.1 v67.8,16.88
  Bottom 0.305: v67.8,16.88 67.8,16.24 67.48,15.92 67.48,12.75 66.21,11.48 66.21,9.09 Q1.2
  other vias: 66.21,8.45
N$5
  Top 0.406: Q10.3 106.52,18.46 108.75,18.46 JP8.9 JP8.10
N$7  (via drill 0.5)
  Top 0.406: v72.61,92.89 VCA1:IC6.8 73.88,92.89 74.52,92.26 74.52,84.32 74.1,83.9 R3.1 | VCA1:R12.2 82.56,91.91 VCA1:C4.1
  Bottom 0.406: v72.61,92.89 72.61,93.53 72.93,93.84 80.55,93.84 81.18,93.21 81.18,92.48 81.72,91.94 VCA1:C4.1
  other vias: 82.53,91.94
N$8  (via drill 0.5)
  Top 0.406: VCA1:IC6.14 69.75,85.27 69.51,85.03 VCA1:C7.1 | VCA1:C7.1 69.41,85.06 | v67.53,82.41 VCA1:R18.2 67.56,85.03 VCA1:C7.1 | R4.1 79.86,38.47 79.23,39.1 75.73,39.1 75.42,39.42 75.42,42.59 75.73,42.91 75.73,51.8 74.78,52.75 73.51,52.75 73.19,53.07 73.19,54.66 72.56,55.29 67,55.23 66.91,55.23 v66.21,55.93
  Bottom 0.305: v66.21,55.93 65.89,56.25 65.94,80.83 65.94,81.23 66.99,82.28 67.4,82.28 v67.53,82.41
N$9
  Top 0.406: VCA1:C12.1 101.48,93.13 VCA1:R36.2 101.72,92.89 VCA1:IC5.8 103.98,99.09 R5.1
N$10
  Top 0.406: VCA1:IC5.14 102.38,85.27 VCA1:C2.1 101.8,84.74 VCA1:R6.2 99.71,84.53 R6.1
N$11  (via drill 0.5, 0.6)  (1 unrouted)
  Top 0.254: 101.6,9.15 IC2.9 101.92,9.06 101.92,10.46 102.56,11.1 104.9,11.1
  Top 0.305: 104.9,11.1 R17.1 | R21.2 102.52,28.2 102.24,27.93 102.24,25.39 103.83,24.12 v103.83,21.89
  Top 0.406: R5.2 v105.63,99.24 | v102.4,34.97 v102.4,36.88 | v106.21,61.33 106.85,61.96 v106.85,75.61 | v106.21,49.26 105.9,48.94 105.9,42.93 105.56,42.59 103.99,42.59 103.48,42.08 R15.2
  Bottom 0.305: 102.98,28.24 v103.36,28.31 | v103.83,21.89 103.83,18.4 104.46,17.77 105.41,17.77 106.05,17.13 106.05,15.54 105.02,14.61 105,11.16 R17.1